# EAGLE board demo (EAGLE 5.11)
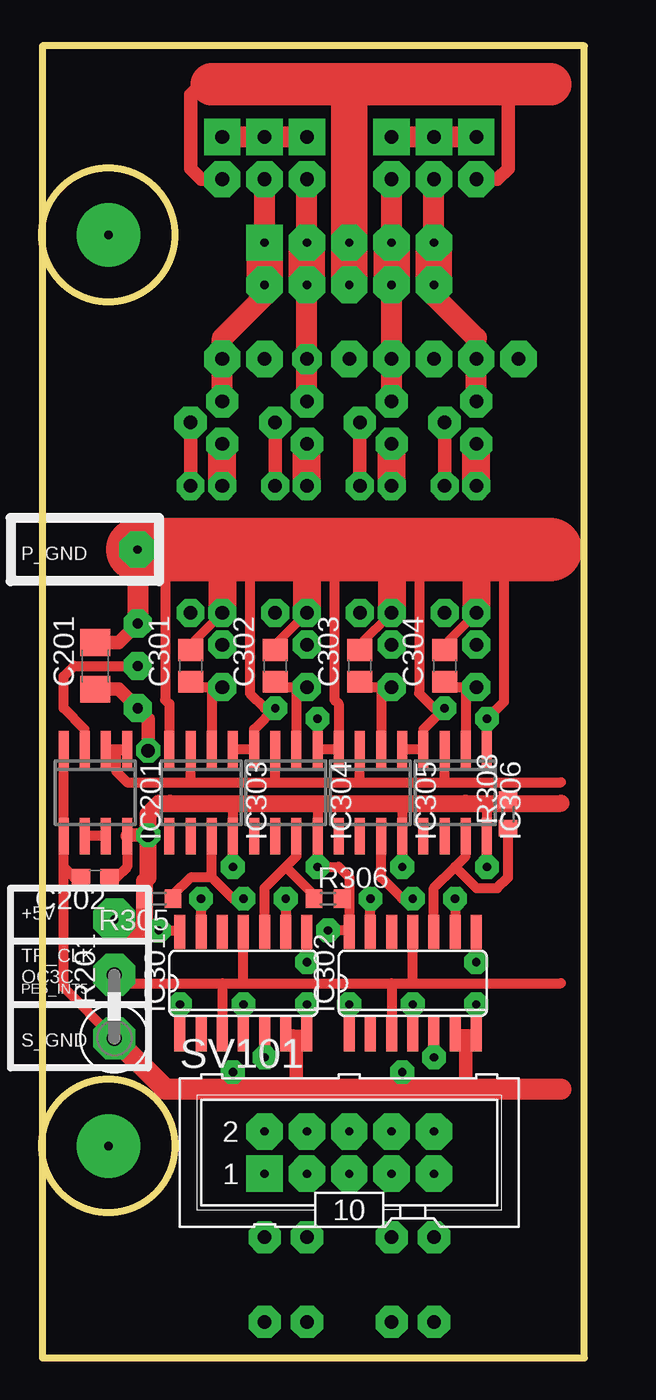
[diagram p0: board, top side]
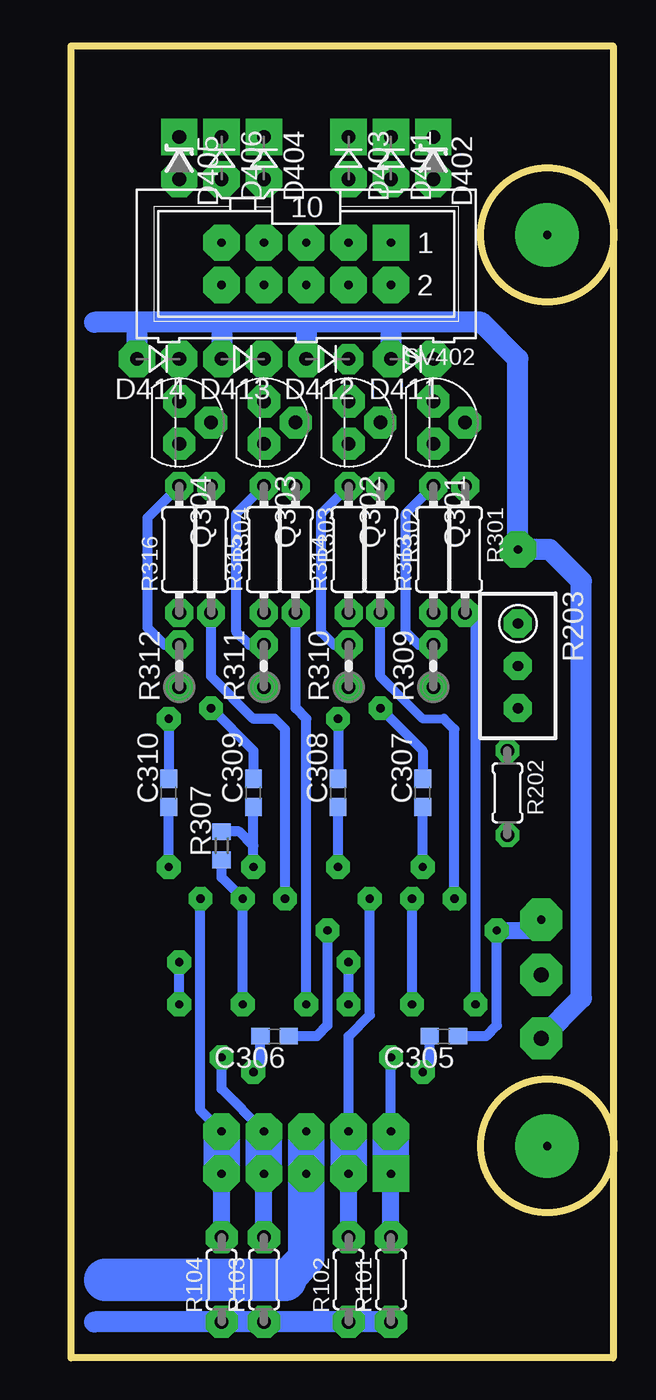
[diagram p1: board, bottom side, seen from below]

Size 32.56 x 78.74 mm. Coordinates in mm from the lower left corner, seen from the top.
Outline: 0.04,0 32.56,0 32.56,78.74 0.04,78.74 0.04,0
Outline: circle at 4,12.71 radius 4
Outline: circle at 4,67.39 radius 4
Copper layers (1*16): Top 0.035mm / dielectric 1.5mm / Bottom 0.035mm
Design rules "default *": minimum track width 10mil, minimum drill 19mil, track to track 8mil, track to pad 8mil, pad to pad 8mil, via to via 8mil, smd to smd 8mil, copper to edge 40mil, drill to drill 8mil, minimum pad ring 10mil, minimum via ring 8mil, stop-mask expansion 4mil, vias tented up to drill 0mil, thermal gap 10mil

## Footprints (pad centres in the part's own frame; a part is rotated, then mirrored left to right if it is on the bottom)
C1206 = smd 1.6 x 1.8: 1 -1.4,0; 2 1.4,0
C0603 = smd 1.1 x 1: 1 -0.85,0; 2 0.85,0
C0805 = smd 1.3 x 1.5: 1 -0.95,0; 2 0.95,0
D-2.5 = drill 0.813 octagon: A 1.27,0; C -1.27,0
ZDIO-2.5 = drill 0.813 octagon: A 1.27,0; C -1.27,0
SO08 = smd 0.6 x 2.2: 1 -1.905,-2.6; 2 -0.635,-2.6; 3 0.635,-2.6; 4 1.905,-2.6; 5 1.905,2.6; 6 0.635,2.6; 7 -0.635,2.6; 8 -1.905,2.6
SO14 = smd 0.66 x 2.032: 1 -3.81,-3.073; 2 -2.54,-3.073; 3 -1.27,-3.073; 4 0,-3.073; 5 1.27,-3.073; 6 2.54,-3.073; 7 3.81,-3.073; 8 3.81,3.073; 9 2.54,3.073; 10 1.27,3.073; 11 0,3.073; 12 -1.27,3.073; 13 -2.54,3.073; 14 -3.81,3.073
TO92 = drill 0.813 octagon: 1 1.27,0; 2 0,1.905; 3 -1.27,0
0204/5 = drill 0.813 octagon: 1 -2.54,0; 2 2.54,0
0411V = drill 0.914 octagon: 1 -2.54,0; 2 1.27,0
RTRIM3296W = drill 0.61 round: 1 0,-2.54; 2 0,0; 3 0,2.54
0204/7 = drill 0.813 octagon: 1 -3.81,0; 2 3.81,0
R0603 = smd 1 x 1.1: 1 -0.85,0; 2 0.85,0
0204V = drill 0.813 octagon: 1 -1.27,0; 2 1.27,0
M10-HOME = drill 0.5 pad 2.184 square: 1 -5.08,-1.27 | drill 0.5 pad 2.184 octagon: 2 -5.08,1.27; 3 -2.54,-1.27; 4 -2.54,1.27; 5 0,-1.27; 6 0,1.27; 7 2.54,-1.27; 8 2.54,1.27; 9 5.08,-1.27; 10 5.08,1.27

## Placement (x,y rotation side)
C201  100nF  [C1206]  3.21,41.53 90 top
C202  100nF  [C0603]  3.21,28.83 180 top
C301  100nF  [C0805]  8.93,41.53 90 top
C302  100nF  [C0805]  14.01,41.53 90 top
C303  100nF  [C0805]  19.09,41.53 90 top
C304  100nF  [C0805]  24.17,41.53 90 top
C305  100nF  [C0603]  10.2,19.3 180 bottom
C306  100nF  [C0603]  20.36,19.3 180 bottom
C307  100nF  [C0603]  11.47,33.91 90 bottom
C308  100nF  [C0603]  16.55,33.91 90 bottom
C309  100nF  [C0603]  21.63,33.91 90 bottom
C310  100nF  [C0603]  26.71,33.91 90 bottom
D401  [D-2.5]  13.38,72.01 270 bottom
D402  [ZDIO-2.5]  10.84,72.01 270 bottom
D403  [D-2.5]  15.91,72.01 270 bottom
D404  [D-2.5]  20.99,72.01 270 bottom
D405  [ZDIO-2.5]  26.07,72.01 270 bottom
D406  [D-2.5]  23.54,72.01 270 bottom
D411  [D-2.5]  12.11,59.94 180 bottom
D412  [D-2.5]  17.18,59.94 180 bottom
D413  [D-2.5]  22.27,59.94 180 bottom
D414  [D-2.5]  27.34,59.94 180 bottom
IC201  LM358D  [SO08]  3.21,33.91 180 top
IC301  4013D  [SO14]  12.11,22.48 0 top
IC302  4013D  [SO14]  22.27,22.48 0 top
IC303  LM311D  [SO08]  9.57,33.91 180 top
IC304  LM311D  [SO08]  14.64,33.91 180 top
IC305  LM311D  [SO08]  19.72,33.91 180 top
IC306  LM311D  [SO08]  24.8,33.91 180 top
Q301  BC547  [TO92]  10.84,56.13 270 bottom
Q302  BC547  [TO92]  15.91,56.13 270 bottom
Q303  BC547  [TO92]  20.99,56.13 270 bottom
Q304  BC547  [TO92]  26.07,56.13 270 bottom
R101  [0204/5]  13.38,4.7 90 bottom
R102  [0204/5]  15.91,4.7 90 bottom
R103  [0204/5]  20.99,4.7 90 bottom
R104  [0204/5]  23.54,4.7 90 bottom
R201  1K  [0411V]  4.36,21.72 90 top
R202  2K  [0204/5]  6.39,33.91 270 bottom
R203  2K  [RTRIM3296W]  5.75,41.53 180 bottom
R301  1K  [0204/7]  8.93,48.51 270 bottom
R302  1K  [0204/7]  14.01,48.51 270 bottom
R303  1K  [0204/7]  19.09,48.51 270 bottom
R304  1K  [0204/7]  24.17,48.51 270 bottom
R305  1K  [R0603]  7.03,27.56 180 top
R306  1K  [R0603]  17.18,27.56 0 top
R307  1K  [R0603]  23.54,30.73 90 bottom
R308  1K  [R0603]  27.98,32.64 90 top
R309  1K  [0204V]  10.84,41.53 90 bottom
R310  1K  [0204V]  15.91,41.53 90 bottom
R311  1K  [0204V]  20.99,41.53 90 bottom
R312  1K  [0204V]  26.07,41.53 90 bottom
R313  1R0  [0204/7]  10.84,48.51 90 bottom
R314  1R0  [0204/7]  15.91,48.51 90 bottom
R315  1R0  [0204/7]  20.99,48.51 90 bottom
R316  1R0  [0204/7]  26.07,48.51 90 bottom
SV101  BH10S  [M10-HOME]  18.45,12.32 0 top
SV402  BH10S  [M10-HOME]  18.45,65.66 180 bottom

## Library data of the parts
C201 C202 C301-C310 R101-R104 R201-R203 R301-R316 = rcl
D401-D406 D411-D414 = diode
IC201 IC303-IC306 = linear
IC301 IC302 = 40xx
Q301-Q304 = transistor-npn
SV101 SV402 = con-harting-ml

## Nets
+5V: C202.1 C305.1 C306.1 C307.1 C308.1 C309.1 C310.1 IC201.8 IC301.14 IC302.14 IC303.8 IC304.8 IC305.8 IC306.8 R202.2 R305.2 R306.2 R307.2 R308.2
CMP_REF: IC201.1 IC201.2 IC303.3 IC304.3 IC305.3 IC306.3
FB11: Q301.1 R309.2 R313.2
FB12: Q302.1 R310.2 R314.2
FB13: Q303.1 R311.2 R315.2
FB14: Q304.1 R312.2 R316.2
GND: C201.2 C202.2 C301.2 C302.2 C303.2 C304.2 C305.2 C306.2 C307.2 C308.2 C309.2 C310.2 D411.A D412.A D413.A D414.A IC201.4 IC201.5 IC301.6 IC301.7 IC301.8 IC302.6 IC302.7 IC302.8 IC303.1 IC303.4 IC304.1 IC304.4 IC305.1 IC305.4 IC306.1 IC306.4 R201.1 R203.1 R313.1 R314.1 R315.1 R316.1
M11: D401.A D411.C Q301.3 SV402.1 SV402.2
M11_EN: IC301.5 R101.2 SV101.1 SV101.2
M12: D403.A D412.C Q302.3 SV402.3 SV402.4
M12_EN: IC301.9 R102.2 SV101.3 SV101.4
M13: D404.A D413.C Q303.3 SV402.7 SV402.8
M13_EN: IC302.5 R103.2 SV101.7 SV101.8
M14: D406.A D414.C Q304.3 SV402.9 SV402.10
M14_EN: IC302.9 R104.2 SV101.9 SV101.10
N$1: C201.1 R202.1 R203.3
N$2: D401.C D402.C D403.C
N$3: IC201.6 IC201.7
N$4: D404.C D405.C D406.C
N$5: IC301.10 IC304.7 R306.1
N$7: Q301.2 R301.1
N$8: IC301.13 R302.2
N$9: IC301.1 R301.2
N$10: IC301.4 IC303.7 R305.1
N$11: Q302.2 R302.1
N$12: Q304.2 R304.1
N$13: Q303.2 R303.1
N$14: IC302.13 R304.2
N$15: IC302.10 IC306.7 R308.1
N$16: IC302.1 R303.2
N$17: C304.1 IC306.2 R312.1
N$18: IC302.4 IC305.7 R307.1
N$19: C303.1 IC305.2 R311.1
N$20: C302.1 IC304.2 R310.1
N$22: C301.1 IC303.2 R309.1
S$2: D402.A D405.A SV402.5 SV402.6
S$24: R101.1 R102.1 R103.1 R104.1
TR_CLK: IC301.3 IC301.11 IC302.3 IC302.11 R201.2
VCC: SV101.5 SV101.6
~0.5V: IC201.3 R203.2

## Tracks (layer width: path | path; a pad name or v marks a point on that pad's centre or on a via)
+5V  (via drill 0.5 pad 1.42, 0.5 pad 2.54)
  Top 0.61: 11.47,33.27 16.55,33.27 | 21.63,33.27 16.55,33.27 | 25.44,33.27 21.63,33.27 | 21.63,33.27 IC305.8 v21.63,29.46 | 18.45,27.56 IC302.14 18.35,25.65 v17.18,25.65 | 18.45,27.56 18.45,28.83 17.82,29.46 v16.55,29.46 IC304.8 16.55,33.27 | 11.47,33.27 IC303.8 v11.47,29.46 | v26.71,29.46 IC306.8 C310.1 26.71,33.27 27.56,33.49 R308.2 | 18.45,27.56 R306.2 | v7.03,25.65 8.19,25.65 IC301.14 | C202.1 4.49,28.83 5.12,29.46 IC201.8 | 7.71,33.27 11.47,33.27
  Top 0.813: v6.39,31.37 5.18,31.37 IC201.8
  Top 1.016: 31.15,33.27 26.71,33.27 25.44,33.27 7.71,33.27 7.03,33.27 6.39,32.64 v6.39,31.37 6.39,28.83 6.17,28.61 R305.2 6.17,25.87 6.39,25.65 | v7.03,25.65 6.39,25.65 | 6.39,25.65 4.99,25.65 v4.36,26.29
  Bottom 0.61: v11.47,29.46 C307.1 | v16.55,29.46 C308.1 | C309.1 v21.63,29.46 21.63,30.73 22.48,31.58 R307.2 | v26.71,29.46 C310.1 | C306.1 17.82,19.3 17.18,19.94 v17.18,25.65 | C305.1 7.66,19.3 7.03,19.94 v7.03,25.65
  Bottom 1.016: v7.03,25.65 4.99,25.65 v4.36,26.29
CMP_REF
  Top 0.61: 8.93,34.54 IC303.3 | 8.93,34.54 14.01,34.54 | 14.01,34.54 19.09,34.54 | 19.09,34.54 24.17,34.54 | 24.17,34.54 31.15,34.54 | 24.17,34.54 IC306.3 | 19.09,34.54 IC305.3 | 14.01,34.54 IC304.3 | IC201.2 IC201.1 4.49,36.45 4.49,35.18 5.12,34.54 8.93,34.54
FB11  (via drill 0.5 pad 1.68, 0.5 pad 1.93)
  Top 1.676: R313.2 Q301.1
  Bottom 0.61: R313.2 12.49,50.67 12.49,43.56 11.72,42.8 R309.2
  other vias: 10.84,54.86 10.84,52.32 10.84,42.8
FB12  (via drill 0.5 pad 1.68, 0.5 pad 1.93)
  Top 1.676: R314.2 Q302.1
  Bottom 0.61: R314.2 17.57,50.67 17.57,43.56 16.8,42.8 R310.2
  other vias: 15.91,54.86 15.91,52.32 15.91,42.8
FB13  (via drill 0.5 pad 1.68, 0.5 pad 1.93)
  Top 1.676: R315.2 Q303.1
  Bottom 0.61: R315.2 22.65,50.67 22.65,43.56 21.88,42.8 R311.2
  other vias: 20.99,54.86 20.99,52.32 20.99,42.8
FB14  (via drill 0.5 pad 1.68, 0.5 pad 1.93)
  Top 1.676: R316.2 Q304.1
  Bottom 0.61: R316.2 27.98,50.42 27.98,43.81 26.96,42.8 R312.2
  other vias: 26.07,54.86 26.07,52.32 26.07,42.8
GND  (via drill 0.5 pad 1.42, 0.5 pad 1.68, 0.5 pad 2.18, 0.5 pad 2.54)
  Top 0.508: R316.1 24.17,42.8 | R315.1 19.09,42.8 | R314.1 14.01,42.8 | R313.1 8.93,42.8
  Top 0.61: IC305.1 IC306.4 22.9,37.72 v24.17,38.99 23.54,38.99 22.65,39.88 22.65,47.88 22.9,48.13 22.9,48.51 | v16.55,38.35 IC304.1 IC305.4 17.82,39.24 17.57,39.5 17.57,48.39 17.69,48.51 | v26.71,38.35 IC306.1 | v26.71,38.35 26.71,36.45 | 11.53,36.51 IC303.1 IC304.4 12.74,37.72 v14.01,38.99 13.38,38.99 12.49,39.88 12.49,48.51 | 26.07,25.65 IC302.8 v26.07,23.75 | v26.71,38.35 27.73,39.37 27.73,48.51 | 24.17,42.8 C304.2 | 14.01,42.8 C302.2 | 19.09,42.8 C303.2 | v15.91,23.75 IC301.8 | IC303.4 7.66,39.24 7.41,39.5 7.41,48.39 7.53,48.51 | 26.07,48.51 26.71,47.24 | IC302.7 IC302.6 | IC302.7 v26.07,21.21 | v15.91,21.21 IC301.7 IC301.6 15.18,19.41 15.28,19.3 | IC302.7 25.54,19.41 25.44,19.3 | 8.93,42.8 C301.2 | IC201.4 IC201.5 1.31,29.46 | C202.2 1.95,28.83 1.31,29.46 | 1.31,29.46 1.31,22.23 R201.1
  Top 0.813: 27.98,48.51 27.98,47.88 | C201.2 4.62,42.93 R203.1 | 25.44,16.13 25.44,19.3 | 15.28,16.13 15.28,19.3
  Top 1.27: 31.15,16.13 25.44,16.13 21.63,16.13 | v5.75,48.51 R203.1 | 21.63,16.13 v21.63,17.14 | 21.63,16.13 15.28,16.13 11.47,16.13 | 11.47,16.13 v11.47,17.14 | 11.47,16.13 7.41,16.13 R201.1
  Top 1.676: 26.07,48.51 R316.1 | 20.99,48.51 R315.1 | 15.91,48.51 R314.1 | 10.84,48.51 R313.1
  Top 2.54: 27.73,48.51 27.98,48.51
  Top 3.81: 27.98,48.51 30.52,48.51 | 27.73,48.51 26.07,48.51 22.9,48.51 20.99,48.51 17.69,48.51 15.91,48.51 12.49,48.51 10.84,48.51 7.53,48.51 v5.75,48.51
  Bottom 0.61: C309.2 21.63,36.45 v24.17,38.99 | v16.55,38.35 C308.2 | v26.71,38.35 C310.2 | C307.2 11.47,36.45 v14.01,38.99 | v26.07,21.21 v26.07,23.75 | v15.91,21.21 v15.91,23.75 | C306.2 21.21,17.57 v21.63,17.14 | C305.2 11.05,17.57 v11.47,17.14
  Bottom 1.27: 28.61,62.16 31.15,62.16 | 28.61,62.16 D414.A | 23.54,62.16 28.61,62.16 | 23.54,62.16 D413.A | 18.45,62.16 23.54,62.16 | 18.45,62.16 D412.A | 13.38,62.16 18.45,62.16 | 13.38,62.16 v13.38,59.94 | 13.38,62.16 7.97,62.16 5.75,59.94 v5.75,48.51 3.85,48.51 1.95,46.61 1.95,21.59 R201.1
  other vias: 28.61,59.94 26.07,44.7 23.54,59.94 18.45,59.94 20.99,44.7 15.91,44.7 10.84,44.7 5.75,44.07 4.36,19.18
M11  (via drill 0.5 pad 1.93, 0.5 pad 2.18)
  Top 1.27: SV402.2 13.38,63.75 10.84,61.21 D411.C Q301.3 | SV402.1 D401.A
  Top 2.184: SV402.2 SV402.1
  other vias: 10.84,57.4 10.84,59.94 13.38,70.74
M11_EN  (via drill 0.5 pad 1.42, 0.5 pad 1.93)
  Top 0.61: v13.38,18.03 IC301.5
  Bottom 0.61: SV101.2 v13.38,18.03
  Bottom 1.016: R101.2 SV101.1
  Bottom 2.184: SV101.1 SV101.2
  other vias: 13.38,7.24
M12  (via drill 0.5 pad 1.78, 0.5 pad 1.93, 0.5 pad 2.18)
  Top 1.27: Q302.3 D412.C SV402.4 | SV402.3 D403.A
  Top 2.184: SV402.4 SV402.3
  other vias: 15.91,57.4 15.91,59.94 15.91,70.74
M12_EN  (via drill 0.5 pad 1.42, 0.5 pad 1.93)
  Top 0.61: v14.64,27.56 IC301.9
  Bottom 0.61: SV101.4 15.91,19.3 14.64,20.57 v14.64,27.56
  Bottom 1.016: R102.2 SV101.3
  Bottom 2.184: SV101.3 SV101.4
  other vias: 15.91,7.24
M13  (via drill 0.5 pad 1.93, 0.5 pad 2.18)
  Top 1.27: Q303.3 v20.99,59.94 SV402.8 | SV402.7 D404.A
  Top 2.184: SV402.8 SV402.7
  other vias: 20.99,57.4 20.99,70.74
M13_EN  (via drill 0.5 pad 1.42, 0.5 pad 1.93)
  Top 0.61: v23.54,18.03 IC302.5
  Bottom 0.61: SV101.8 23.54,16.13 v23.54,18.03
  Bottom 1.016: R103.2 SV101.7
  Bottom 2.184: SV101.7 SV101.8
  other vias: 20.99,7.24
M14  (via drill 0.5 pad 1.93, 0.5 pad 2.18)
  Top 1.27: SV402.10 23.54,63.75 26.07,61.21 D414.C Q304.3 | SV402.9 D406.A
  Top 2.184: SV402.10 SV402.9
  other vias: 26.07,57.4 26.07,59.94 23.54,70.74
M14_EN  (via drill 0.5 pad 1.42, 0.5 pad 1.93)
  Top 0.61: v24.8,27.56 IC302.9
  Bottom 0.61: SV101.10 24.8,14.86 v24.8,27.56
  Bottom 1.016: R104.2 SV101.9
  Bottom 2.184: SV101.9 SV101.10
  other vias: 23.54,7.24
N$1  (via drill 0.5 pad 1.42, 0.5 pad 1.68)
  Top 0.813: C201.1 4.62,40.13 R203.3 6.39,38.35 R202.1
  other vias: 5.75,38.99 6.39,36.45
N$2  (via drill 0.5 pad 2.18)
  Top 1.27: v15.91,73.28 v13.38,73.28 v10.84,73.28
N$3
  Top 0.61: IC201.7 IC201.6
N$4  (via drill 0.5 pad 2.18)
  Top 1.27: v20.99,73.28 v23.54,73.28 v26.07,73.28
N$5
  Top 0.61: IC301.10 13.38,28.19 14.64,29.46 | 14.64,29.46 15.28,30.1 IC304.7 | R306.1 16.34,27.77 14.64,29.46
N$7  (via drill 0.5 pad 1.68, 0.5 pad 1.93)
  Top 0.813: R301.1 Q301.2
  other vias: 8.93,52.32 8.93,56.13
N$8  (via drill 0.5 pad 1.42, 0.5 pad 1.68)
  Top 0.61: IC301.13 v9.57,27.56
  Bottom 0.508: 10.2,38.35 11.47,38.35 13.38,40.26
  Bottom 0.61: v9.57,27.56 9.57,37.72 10.2,38.35 | 13.38,40.26 14.01,40.89 R302.2
  other vias: 14.01,44.7
N$9  (via drill 0.5 pad 1.42, 0.5 pad 1.68)
  Top 0.61: IC301.1 v8.3,21.21
  Bottom 0.61: v8.3,21.21 8.3,44.07 R301.2
  other vias: 8.93,44.7
N$10  (via drill 0.5 pad 1.42)
  Top 0.61: 10.2,28.83 IC303.7 | v12.11,27.56 11.47,27.56 10.2,28.83 | IC301.4 v12.11,21.21 | R305.1 7.88,27.77 8.93,28.83 10.2,28.83
  Bottom 0.61: v12.11,21.21 v12.11,27.56
N$11  (via drill 0.5 pad 1.68, 0.5 pad 1.93)
  Top 0.813: R302.1 Q302.2
  other vias: 14.01,56.13 14.01,52.32
N$12  (via drill 0.5 pad 1.68, 0.5 pad 1.93)
  Top 0.813: R304.1 Q304.2
  other vias: 24.17,56.13 24.17,52.32
N$13  (via drill 0.5 pad 1.68, 0.5 pad 1.93)
  Top 0.813: R303.1 Q303.2
  other vias: 19.09,56.13 19.09,52.32
N$14  (via drill 0.5 pad 1.42, 0.5 pad 1.68)
  Top 0.61: IC302.13 v19.72,27.56
  Bottom 0.61: v19.72,27.56 19.72,37.72 20.36,38.35 21.63,38.35 24.17,40.89 R304.2
  other vias: 24.17,44.7
N$15
  Top 0.61: IC302.10 23.54,28.19 24.8,29.46 | 24.8,29.46 25.44,30.1 IC306.7 | R308.1 27.98,28.83 27.34,28.19 26.07,28.19 24.8,29.46
N$16  (via drill 0.5 pad 1.42, 0.5 pad 1.68)
  Top 0.61: IC302.1 v18.45,21.21
  Bottom 0.61: v18.45,21.21 18.45,38.35 19.09,38.99 R303.2
  other vias: 19.09,44.7
N$17  (via drill 0.5 pad 1.68)
  Top 0.61: 25.44,40.26 24.49,40.26 C304.1 | 25.44,40.26 IC306.2 | 25.44,40.26 v26.07,40.26
N$18  (via drill 0.5 pad 1.42)
  Top 0.61: v22.27,27.56 21.63,27.56 20.36,28.83 IC305.7 | IC302.4 v22.27,21.21
  Bottom 0.61: v22.27,21.21 v22.27,27.56 23.54,28.83 R307.1
N$19  (via drill 0.5 pad 1.68)
  Top 0.61: 20.36,40.26 19.41,40.26 C303.1 | 20.36,40.26 IC305.2 | 20.36,40.26 v20.99,40.26
N$20  (via drill 0.5 pad 1.68)
  Top 0.61: 15.28,40.26 14.33,40.26 C302.1 | 15.28,40.26 IC304.2 | 15.28,40.26 v15.91,40.26
N$21  (via drill 0.5 pad 3.81)
  other vias: 4,67.39
N$22  (via drill 0.5 pad 1.68)
  Top 0.61: 10.2,40.26 9.25,40.26 C301.1 | 10.2,40.26 IC303.2 | 10.2,40.26 v10.84,40.26
N$49  (via drill 0.5 pad 3.81)
  other vias: 4,12.71
S$2  (via drill 0.5 pad 2.18)
  Top 0.813: D405.A 27.34,70.74 27.98,71.37 27.98,76.45 | 18.45,76.45 9.57,76.45 8.93,75.82 8.93,71.37 9.57,70.74 D402.A
  Top 2.184: SV402.6 SV402.5 18.45,76.45
  Top 2.54: 30.52,76.45 27.98,76.45 18.45,76.45 10.2,76.45
  other vias: 26.07,70.74 10.84,70.74
S$24  (via drill 0.5 pad 1.93)
  Bottom 1.016: R104.1 R103.1 R102.1 R101.1
  Bottom 1.27: 31.15,2.16 R104.1 R101.1
  other vias: 20.99,2.16 23.54,2.16 15.91,2.16 13.38,2.16
TR_CLK  (via drill 0.5 pad 2.54)
  Top 0.61: 12.11,22.48 IC301.11 | 10.84,22.48 IC301.3 | 12.11,22.48 20.99,22.48 | 20.99,22.48 22.27,22.48 | 22.27,22.48 IC302.11 | 20.99,22.48 IC302.3 | R201.2 4.87,22.48 10.84,22.48 | 22.27,22.48 31.15,22.48 | 10.84,22.48 12.11,22.48
  other vias: 4.36,22.99
VCC
  Bottom 2.184: SV101.6 SV101.5 18.45,5.97 19.72,4.7
  Bottom 2.54: 19.72,4.7 30.52,4.7
~0.5V  (via drill 0.5 pad 1.68)
  Top 0.61: IC201.3 2.58,37.72 1.31,38.99 1.31,40.89 1.95,41.53 R203.2
  other vias: 5.75,41.53

## Text on the board
tPlace: P_GND | +5V | TR_CLK | OC3C | PE5_INT5 | S_GND